# Altium PCB master-pcb.PcbDoc
Units mil, origin at the board's own origin, x right, y up, seen from the top; angles counter-clockwise.
Board outline 4685 x 4350 mil, 2 copper layers (Top Layer, Bottom Layer); 23 components, 82 nets, 235 pads, 18 vias.
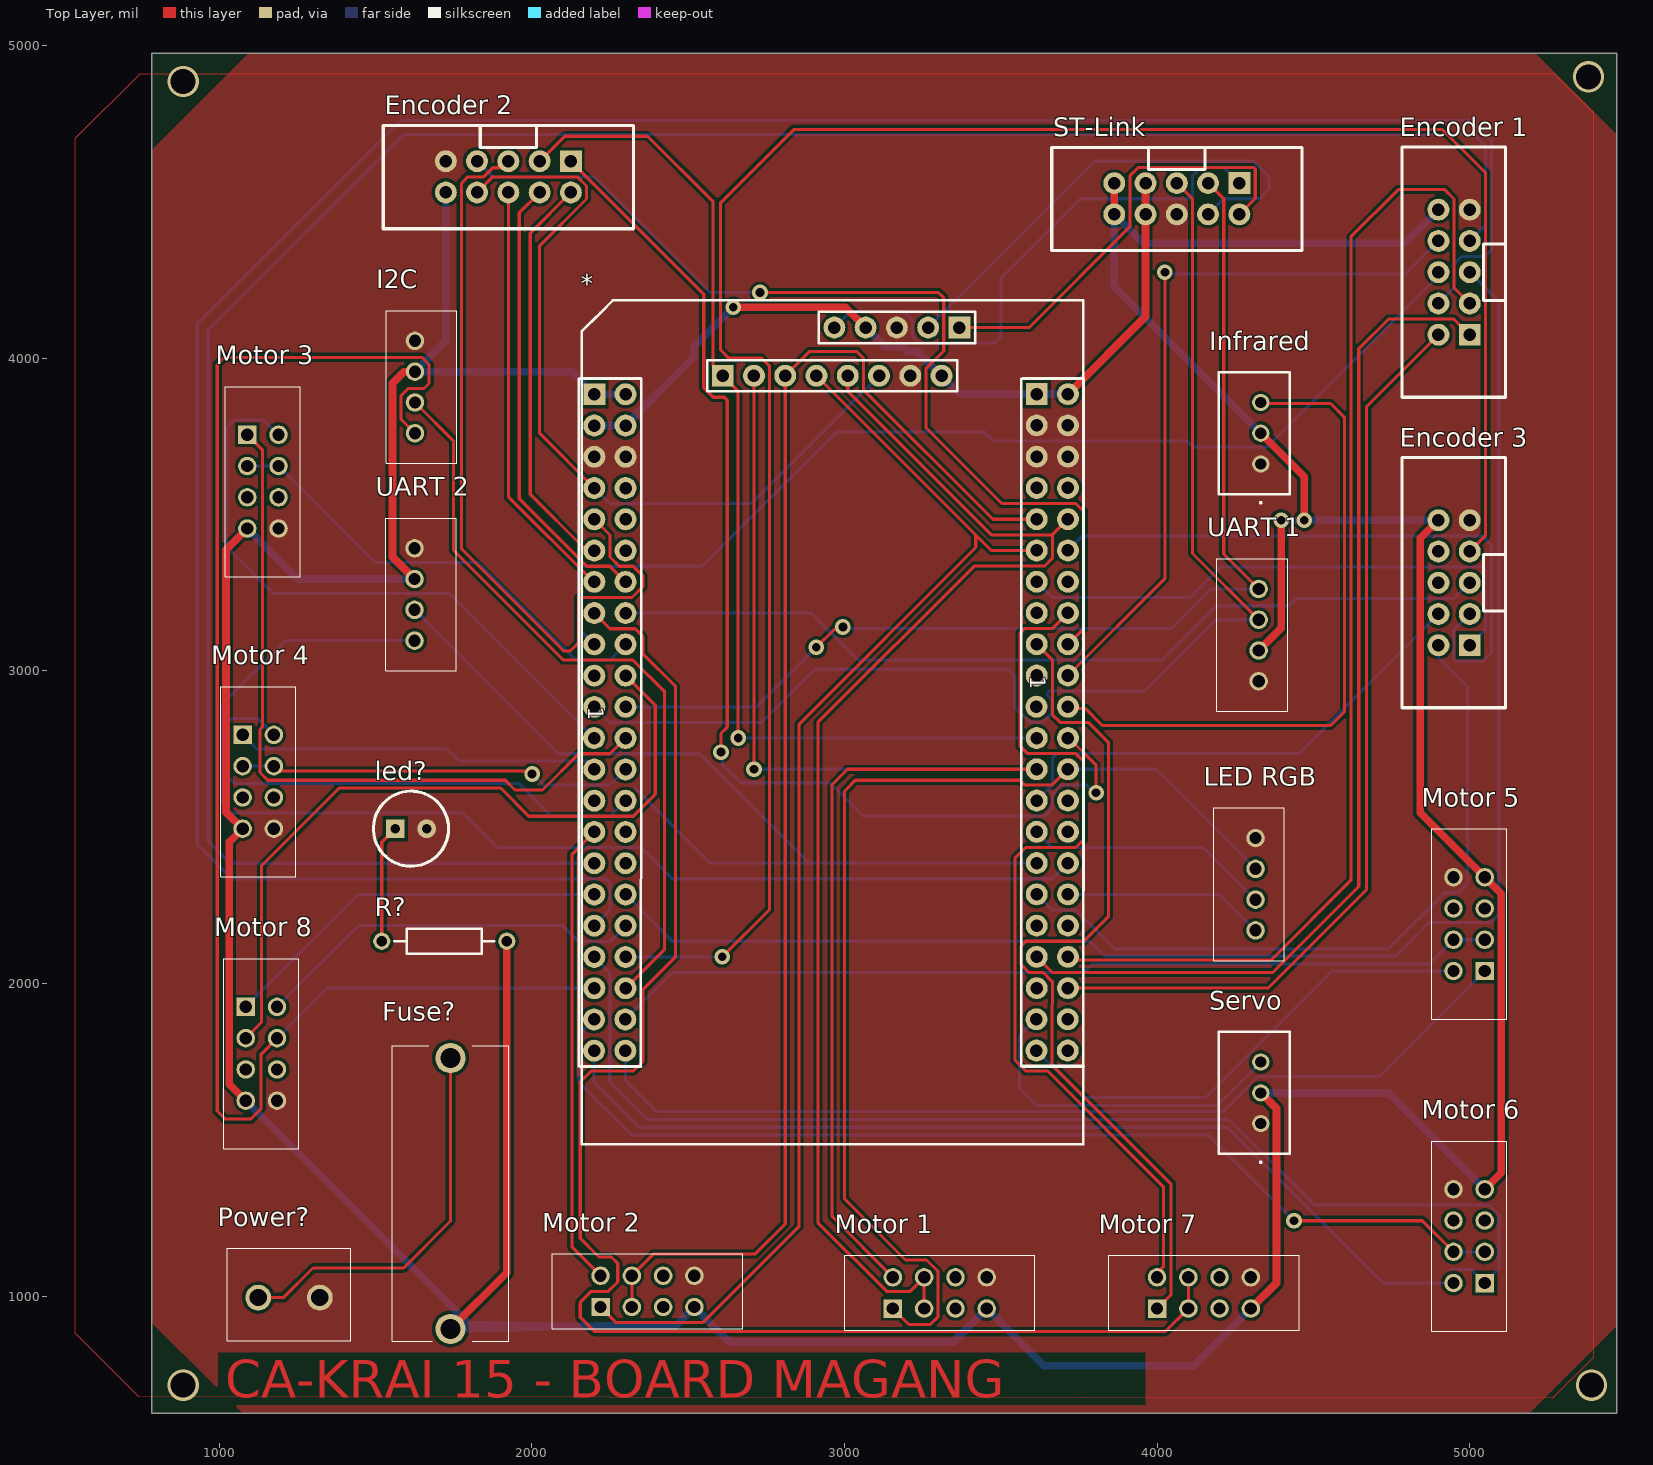
[diagram p0: Top Layer view]
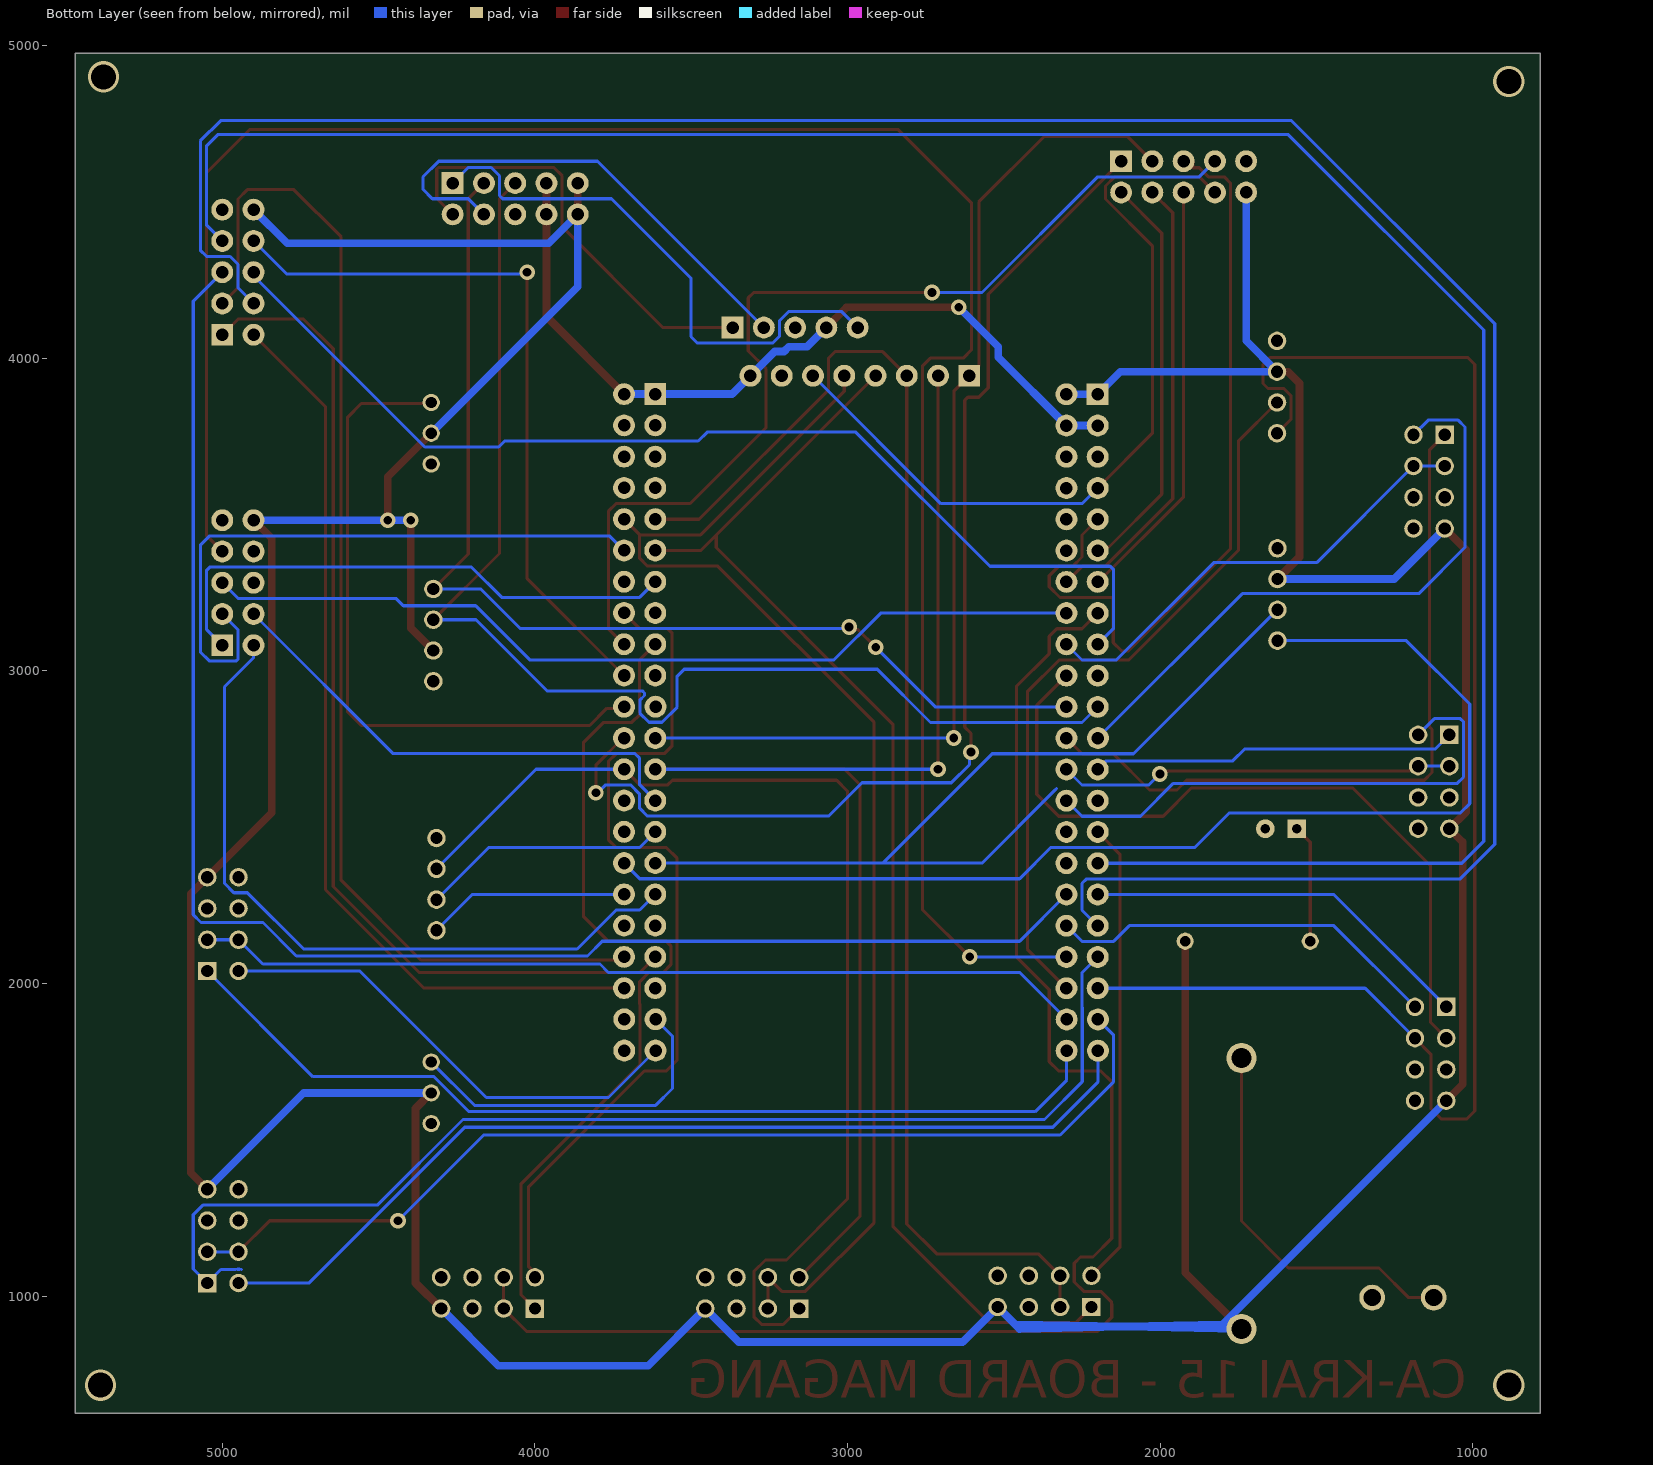
[diagram p1: Bottom Layer view, seen from below]

## Layer stack, top to bottom
Top Solder: solder mask 0.4, Solder Resist, Dk 3.5
Top Layer: signal copper 1.4
Dielectric 1: dielectric 12.6, FR-4, Dk 4.8
Bottom Layer: signal copper 1.4
Bottom Solder: solder mask 0.4, Solder Resist, Dk 3.5

## Board outline
785,625 5470,625 5470,4975 785,4975

## Design rules (kind name [scope] priority, off if disabled: settings)
Clearance [All] p1: gap=10 ignorepadtopadclearanceinfootprint=FALSE except(0: Arc-Hole Track-Hole SMDPad-Hole THPad-Hole Via-Hole Fill-Hole Poly-Hole Region-Hole Text-Hole)
PolygonConnect [All] p1: connectstyle=Direct reliefconductorwidth=10 reliefentries=4 polygonreliefangle="90 Angle" airgapwidth=10
RoutingVias [All] p1: holewidth=28 width=50 viastyle="Through Hole" minholewidth=28 minwidth=50 maxholewidth=28 maxwidth=50
SolderMaskExpansion [All] p1: expansion=4 istentingtop=FALSE
Width 3V [InNet('3V')] p1: maxlimit=30 minlimit=20 preferedwidth=25 minimp=50.000000 maximp=50.000000 favimp=50.000000
Width Width_1 [InNet('GND')] p2: maxlimit=30 minlimit=20 preferedwidth=25 minimp=50.000000 maximp=50.000000 favimp=50.000000
Width 5V [InNet('5V')] p3: maxlimit=30 minlimit=20 preferedwidth=25 minimp=50.000000 maximp=50.000000 favimp=50.000000
30 further rules are at their usual default settings.

## Components (designator, comment, footprint, x,y, rotation, side; value= is the part's Value field where it differs from the comment)
* "STM32F407VET6" MICON 2959.31,2835.28 r0 top
"Encoder 1" "Header ISP" "Header ISP" 5100,4175.07 r90 top
"Encoder 2" "Header ISP" "Header ISP" 2025,4730 r180 top
"Encoder 3" "Header ISP" "Header ISP" 5100,3181.75 r90 top
Fuse? "C3131" C3131 1740,895 r90 top
I2C "B4B-XH-A_LF__SN_" B4BXHALFSN 1626.24,4055.28 r270 top
Infrared "B3B-XH-A_LF__SN_" B3BXHALFSN 4331.73,3661.57 r90 top
"LED RGB" "B4B-XH-A_LF__SN_" B4BXHALFSN 4315,2169.72 r90 top
led? "LED 5mm" "LED 5mm" 1613.57,2495 r0 top
"Motor 1" "09181089622" 09181089622 3155,960 r0 top
"Motor 2" "09181089622" 09181089622 2220,965 r0 top
"Motor 3" "09181089622" 09181089622 1090,3755 r270 top
"Motor 4" "09181089622" 09181089622 1075,2795 r270 top
"Motor 5" "09181089622" 09181089622 5048.02,2039.79 r90 top
"Motor 6" "09181089622" 09181089622 5048.02,1041.54 r90 top
"Motor 7" "09181089622" 09181089622 4000,960 r0 top
"Motor 8" "09181089622" 09181089622 1085,1925 r270 top
Power? "KF301-2P" KF3012P 1125,995 r0 top
R? "Resistor 0.25W" "Resistor 0.25W" 1720,2135 r180 top
Servo "B3B-XH-A_LF__SN_" B3BXHALFSN 4331.73,1551.57 r90 top
ST-Link "Header ISP" "Header ISP" 4163.19,4660 r180 top
"UART 1" "B4B-XH-A_LF__SN_" B4BXHALFSN 4325,2966.57 r90 top
"UART 2" "B4B-XH-A_LF__SN_" B4BXHALFSN 1625,3391.85 r270 top

## Footprints (in the part's own frame and the unit in brackets; to place one, negate y for a bottom-side part, rotate by r counter-clockwise, add the part's x,y. Pads: shape width x height; smd on the part's side, far side on the other; paste and mask are expansions set on the pad)
09181089622 [mm]
  rect 1.5x1.5 hole 1: 1(0,0)
  round 1.5 hole 1: 2(0,2.54) 3(2.54,0) 4(2.54,2.54) 5(5.08,0) 6(5.08,2.54) 7(7.62,0) 8(7.62,2.54)
  silkscreen extent -3.92,-1.78 11.54,4.32, body extent -3.92,-1.73 11.54,4.27, height 5.25
B3BXHALFSN [mm]
  round 1.4 hole 0.9: 1(0,0) 2(2.5,0) 3(5,0)
  silkscreen extent -3.2,-2.35 7.45,3.4, body extent -2.45,-2.35 7.45,3.4, height 7.09
B4BXHALFSN [mm]
  round 1.5 hole 1: 1(0,0) 2(2.5,0) 3(5,0) 4(7.5,0)
  silkscreen extent -2.45,-2.35 9.95,3.4, body extent -2.45,-2.35 9.95,3.4, height 7.52
C3131 [mm]
  round 2.46 hole 1.64: 1(0,0) 2(22,0)
  silkscreen extent -1,-4.75 23,4.75, body extent -1,-4.75 23,4.75, height 10.6
"Header ISP" [mil]
  rect 70x70 hole 40: 1(-100,100)
  round 70 hole 40: 2(-100,200) 3(0,100) 4(0,200) 5(100,100) 6(100,200) 7(200,100) 8(200,200) 9(300,100) 10(300,200)
  silkscreen extent -300,-14 500,316, body extent -300,-20 501,334, height 365
KF3012P [mm]
  round 2.1 hole 1.4: 1(0,0) 2(5,0)
  silkscreen extent -2.5,-3.5 7.5,4, body extent -2.99,-3.35 7.51,4.15, height 10
"LED 5mm" [mil]
  rect 60x60 hole 30: 1(-50,0)
  round 60 hole 30: 2(50,0)
  silkscreen extent -120,-120 120,120, body extent -117,-118 96,118, height 268
MICON [mil] "STM32F407VET6"
  round 70 hole 40: 3V3(-759.34,949.33) 3V3(-659.34,949.33) 3V3(108.46,1262.79) 3V3(351.3,1108.52) 3V3(755.69,1049.72) 5V(-659.34,1049.33) BOOT0(8.46,1262.79) GND(-759.34,849.33) GND(-659.34,849.33) GND(208.46,1262.79) GND(251.3,1108.52) GND(655.69,849.72) GND(655.69,949.72) GND(755.69,849.72) GND(755.69,949.72) PA0(755.69,-550.28) PA1(655.69,-550.28) PA2(755.69,-450.28) PA3(655.69,-450.28) PA4(755.69,-350.28) PA5(655.69,-350.28) PA6(755.69,-250.28) PA7(655.69,-250.28) PA8(-759.34,149.33) PA9(-659.34,49.33) PA10(-759.34,49.33) PA11(-659.34,-50.67) PA12(-760.12,-50.39) PA15(-659.34,-150.67) PB0(755.69,-50.28) PB1(655.69,-50.28) PB3(-659.34,-750.67) PB5(-759.34,-750.67) PB6(-659.34,-850.67) PB7(-759.34,-850.67) PB8(-660.12,-950.39) PB9(-760.12,-950.39) PB10(655.69,449.72) PB11(755.69,549.72) PB12(-48.7,1108.52) PB12(655.69,549.72) PB13(51.3,1108.52) PB13(755.69,649.72) PB14(-148.7,1108.52) PB14(655.69,649.72) PB15(-759.33,749.33) PB15(151.3,1108.52) PC0(755.69,-750.28) PC1(655.69,-750.28) PC2(755.69,-650.28) PC3(655.69,-650.28) PC4(755.69,-150.28) PC5(-248.7,1108.52) PC5(655.69,-150.28) PC6(-759.34,349.33) PC7(-659.34,249.33) PC8(-759.34,249.33) PC9(-659.34,149.33) PC10(-759.34,-150.67) PC11(-659.34,-250.67) PC12(-759.34,-250.67) PC13(655.69,-850.28) PD0(-659.34,-350.67) PD1(-759.34,-350.67) PD2(-659.34,-450.67) PD3(-759.34,-450.67) PD4(-659.34,-550.67) PD5(-759.34,-550.67) PD6(-659.34,-650.67) PD7(-759.34,-650.67) PD8(-659.33,749.33) PD9(-659.34,649.33) PD10(-759.34,649.33) PD11(-659.34,549.33) PD12(-759.34,549.33) PD13(-659.34,449.33) PD14(-759.34,449.33) PD15(-659.34,349.33) PE0(-660.12,-1050.39) PE1(-760.12,-1050.39) PE2(754.92,-1050) PE3(654.92,-1050) PE4(754.92,-950) PE5(654.92,-950) PE6(755.69,-850.28) PE7(755.69,49.72) PE8(654.92,50) PE9(755.69,149.72) PE10(655.69,149.72) PE11(755.69,249.72) PE12(655.69,249.72) PE13(755.69,349.72) PE14(655.69,349.72) PE15(755.69,449.72) SWDIO(308.46,1262.79) VDD(655.69,749.72) VREF(755.69,749.72)
  rect 70x70 hole 40: 3V3(655.69,1049.72) 5V(-759.34,1049.33) PB1(-348.7,1108.52) SWCLK(408.46,1262.79)
  silkscreen extent -809,-1350 806,1350, body extent -810,-1100 806,1313, height 327
"Resistor 0.25W" [mm]
  round 1.4 hole 0.85: 1(-5.08,0) 2(5.08,0)
  silkscreen extent -4.06,-1.02 4.06,1.02, body extent -5.35,-1.27 5.35,1.33, height 2.7

## Part data
*: library part Micon?
"Encoder 1" "Encoder 3": "Encoder Posisi X"
"Encoder 2": "Encoder Posisi Y"
Fuse?: "Undefined or Miscellaneous", Manufacturer_Name="Xucheng Elec", Datasheet Link=https://datasheet.lcsc.com/szlcsc/XC-Elec-Shenzhen-5x20-BLX-Fuse-holder_C3131.pdf, Height=10.5mm, Manufacturer_Part_Number=C3131
I2C "LED RGB" "UART 1" "UART 2": "Connector", Arrow Part Number=B4B-XH-A(LF)(SN), Manufacturer_Name="JST (JAPAN SOLDERLESS TERMINALS)", Arrow Price/Stock=https://www.arrow.com/en/products/b4b-xh-a-lf-sn/jst-manufacturing, Datasheet Link=https://datasheet.lcsc.com/szlcsc/JST-Sales-America-B4B-XH-A-LF-SN_C144395.pdf, Height=7mm, Manufacturer_Part_Number=B4B-XH-A(LF)(SN)
Infrared: "Connector", Arrow Part Number=B3B-XH-A(LF)(SN), Manufacturer_Name="JST (JAPAN SOLDERLESS TERMINALS)", Arrow Price/Stock=https://www.arrow.com/en/products/b3b-xh-a-lf-sn/jst-manufacturing?region=europe, Datasheet Link=https://datasheet.lcsc.com/szlcsc/1812131720_JST-Sales-America-B3B-XH-A-LF-SN_C144394.pdf, Height=7mm, Manufacturer_Part_Number=B3B-XH-A(LF)(SN)
"Motor 1" "Motor 2" "Motor 3" "Motor 4" "Motor 5" "Motor 6" "Motor 7" "Motor 8": "Connector", Manufacturer_Name=HARTING, Mouser Part Number=617-09181089622, Datasheet Link=http://uk.rs-online.com/web/p/products/6935182, Height=5.5mm, Manufacturer_Part_Number=09181089622, Mouser Price/Stock=https://www.mouser.co.uk/ProductDetail/HARTING/09181089622?qs=FeiuqfHlVTv2CjJEejdN9Q%3D%3D
Power?: "Connector", Manufacturer_Name="Handson Technology", Datasheet Link=http://www.handsontec.com/dataspecs/terminal%20block-5mm.pdf, Height=10mm, Manufacturer_Part_Number=KF301-2P
Servo: "Servo pin", Arrow Part Number=B3B-XH-A(LF)(SN), Manufacturer_Name="JST (JAPAN SOLDERLESS TERMINALS)", Arrow Price/Stock=https://www.arrow.com/en/products/b3b-xh-a-lf-sn/jst-manufacturing?region=europe, Datasheet Link=https://datasheet.lcsc.com/szlcsc/1812131720_JST-Sales-America-B3B-XH-A-LF-SN_C144394.pdf, Height=7mm, Manufacturer_Part_Number=B3B-XH-A(LF)(SN)
ST-Link: "ST-Link Port"

## Via types
v1: diameter 50, hole 28, Top Layer to Bottom Layer, 14 vias
v2: diameter 100, hole 80, Top Layer to Bottom Layer, 3 vias
v3: diameter 100/100 (per signal layer), hole 80, Top Layer to Bottom Layer, 1 vias

## Nets (pads, with @x,y where several pads share a name; then routed paths per layer and width w, separated by ;. In a path a pad name is that pad's centre, name@x,y a point inside that pad or via, vN(x,y) a via of type N, cw(c..) or ccw(c..) an arc to the next point about the centre after c; other vN are vias at no path point)
3V: *.3V3 ST-Link.7 ST-Link.8 | length 2584.1
  Top Layer w25: v1(2644.53,4162.72) 3003.11,4162.72 *.3V3@3067.77,4098.07 ; *.3V3@3715,3885 3963.19,4133.19 ST-Link.8 ST-Link.7
  Bottom Layer w25: *.3V3@2199.97,3784.61 2299.97,3784.61 2518.11,4002.75 2518.11,4036.3 v1(2644.53,4162.72) ; *.3V3@3067.77,4098.07 3129.53,4036.3 3188.11,4036.3 3203.11,4021.3 3233.11,4021.3 3310.61,3943.8 3369.41,3885 3615,3885 *.3V3@3715,3885
5V: "Encoder 1.10" "Encoder 2.10" "Encoder 3.10" "Motor 1.7" "Motor 2.7" "Motor 3.7" "Motor 4.7" "Motor 5.7" "Motor 6.7" "Motor 7.7" "Motor 8.7" "UART 1.2" "UART 2.2" *.5V Fuse?.1 I2C.2 Infrared.2 R?.1 Servo.2 ST-Link.9 ST-Link.10 | length 17686.4
  Top Layer w25: 1085,1625 1032,1678 1032,2452 1075,2495 1022,2548 1022,3387 1090,3455 ; 1625,3293.43 1554.21,3364.22 1554.21,3920 1591.06,3956.85 I2C.2 ; Fuse?.1 1920,1075 R?.1 ; ST-Link.10 ST-Link.9 ; 4300,960 4382,1042 4382,1599.73 Servo.2 ; 4325,3065 4397.03,3137.03 v1(4397.03,3481.75) ; Infrared.2 4471,3620.73 v1(4471,3481.75) ; 4900,3481.75 4842,3423.75 4842,2545.81 5048.02,2339.79 5101,2286.81 5101,1394.51 5048.02,1341.54
  Bottom Layer w25: 1085,1625 1800.36,909.64 2114.37,902.57 ; 1090,3455 1251.57,3293.43 1625,3293.43 ; 1725,4530 1725,4055.61 I2C.2 2127.72,3956.85 2199.97,3884.61 *.5V@2299.97,3884.61 ; Fuse?.1 2114.37,902.57 ; 4300,960 4117,777 3638,777 3455,960 3348,853 2632,853 2520,965 2464.64,909.64 ; Servo.2 4739.56,1650 5048.02,1341.54 ; Infrared.2 3863.19,4228.54 ST-Link.10 3955.69,4367.5 4792.43,4367.5 4900,4475.07 ; v1(4397.03,3481.75) v1(4471,3481.75) 4900,3481.75 ; 2114.37,902.57 2464.64,909.64 ; 2114.37,902.57 2450,895 2464.64,909.64
Fuse: Fuse?.2 Power?.1 | length 1237.6
  Top Layer w10: Power?.1 1205,995 1300,1090 1590,1090 1740,1240 Fuse?.2
GND: "Encoder 1.9" "Encoder 2.9" "Encoder 3.9" "LED RGB.4" "Motor 1.8" "Motor 2.8" "Motor 3.8" "Motor 4.8" "Motor 5.8" "Motor 6.8" "Motor 7.8" "Motor 8.8" "UART 1.1" "UART 2.1" *.GND I2C.1 Infrared.1 led?.2 Power?.2 Servo.1 ST-Link.6
Netled?_1: led?.1 R?.2 | length 378
  Top Layer w10: R?.2 1520,2451.43 led?.1
PA_0: "LED RGB.1" *.PA0 | length 647.7
  Bottom Layer w10: *.PA0 4199.72,2285 4315,2169.72
PA_1: "Encoder 3.2" *.PA1 | length 2337.7
  Bottom Layer w10: *.PA1 3665,2235 3740,2235 3865,2110 4740,2110 4920,2290 4963,2290 4993,2320 4993,2948.75 4900,3041.75 4900,3081.75
PA_2: "UART 2.4" *.PA2 | length 3843
  Bottom Layer w10: 1625,3096.57 1212.57,3096.57 1010,2894 1010,2575 1040,2545 1779,2545 1889.39,2434.61 2350,2434.61 2449.61,2335 3665,2335 *.PA2
PA_3: "UART 2.3" *.PA3 | length 3006
  Bottom Layer w10: 1625,3195 2085.39,2734.61 2537.39,2734.61 2887,2385 ; *.PA3 2887,2385 ; 2332.01,2622.99 cw(c2299.97,2584.61) 2338.35,2616.65 ; 2332.01,2622.99 cw(c2299.97,2584.61) 2338.35,2616.65 ; 2332.01,2622.99 cw(c2299.97,2584.61) 2338.35,2616.65 ; 2332.01,2622.99 cw(c2299.97,2584.61) 2338.35,2616.65 ; 2338.35,2616.65 2570,2385 2887,2385
PA_4: *.PA4
PA_5: "LED RGB.2" *.PA5 | length 789.8
  Bottom Layer w10: *.PA5 3665,2435 4148.15,2435 4315,2268.15
PA_6: *.PA6
PA_7: "Encoder 3.4" *.PA7 | length 1582
  Bottom Layer w10: *.PA7 3665,2635 3665,2720 3680,2735 4453.25,2735 4900,3181.75
PA_8: *.PA8
PA_9: "UART 1.4" *.PA9 ST-Link.3 | length 3550.6
  Top Layer w10: v1(2910,3075) 2967.35,3132.35 2987.35,3132.35 v1(2995,3140) ; ST-Link.3 4213.19,4510 4213.19,3373.66 4325,3261.85
  Bottom Layer w10: *.PA9 2719.61,2884.61 v1(2910,3075) ; v1(2995,3140) 3000,3135 4046,3135 4172.85,3261.85 4325,3261.85
PA_10: "UART 1.3" *.PA10 ST-Link.5 | length 4044.3
  Top Layer w10: ST-Link.5 4113.19,4510 4113.19,3375.24 4325,3163.43
  Bottom Layer w10: *.PA10 2249.97,2834.61 2734.61,2834.61 2905,3005 3522.63,3005 3545,2982.63 3545,2883.79 3593.52,2835.28 3634.94,2835.28 3664.23,2864.57 3664.23,2905.99 3649.35,2920.86 3649.35,2929.14 3655.21,2935 3960,2935 4188.43,3163.43 4325,3163.43
PA_11: "Motor 3.1" *.PA11 | length 2365.6
  Top Layer w10: 1090,3755 1139.06,3705.94 1139.06,2821.28 1130.47,2812.7 1130.47,2674.53 1155,2650 1915.22,2650 1946.38,2618.84 2034.23,2618.84 2150,2734.61 2249.97,2734.61 *.PA11
PA_12: "Motor 3.2" *.PA12 | length 2005.5
  Bottom Layer w10: 1190,3755 1143,3802 1047,3802 1025,3780 1025,3395 1173,3247 1737.08,3247 *.PA12
PA_15: "Motor 4.3" "Motor 4.4" *.PA15 | length 1270.7
  Top Layer w10: 1175,2695 1188.27,2695 1203.27,2680 1975.14,2680 1977.49,2677.65 1993.35,2677.65 v1(2001,2670)
  Bottom Layer w10: 1075,2695 1175,2695 ; v1(2001,2670) 2036.39,2634.61 2249.97,2634.61 *.PA15
PB_0: "Encoder 2.1" *.PB0 | length 3724.1
  Top Layer w10: 2125,4630 2550,4205 2550,3905 2580,3875 2615,3875 2625,3865 2625,2820 2605,2800 v1(2605,2740) ; *.PB0 3718.28,2785 3805,2698.28 v1(3805,2610)
  Bottom Layer w10: v1(2605,2740) 2610,2735 2610,2700 2668,2642 2954,2642 3061,2535 3640,2535 3665,2560 3665,2605.71 3694.29,2635 3773.43,2635 3798.43,2610 v1(3805,2610)
PB_1: "Encoder 2.3" *.PB1 | length 3378.3
  Top Layer w10: 2025,4630 2105,4710 2370,4710 2580,4500 2580,3974.41 2610.61,3943.8 2660,3894.41 v1(2660,2785)
  Bottom Layer w10: v1(2660,2785) *.PB1@3615,2785
PB_3: "Encoder 3.7" *.PB3 | length 6743
  Top Layer w10: v1(2609,2085) 2760.61,2236.61 2760.61,3974.39 2735,4000 2630,4000 2604,4026 2604,4497 2838,4731 4913,4731 5050,4594 5050,3431.75 5000,3381.75
  Bottom Layer w10: *.PB3 2608.61,2084.61 v1(2609,2085)
PB_5: "Motor 6.1" *.PB5 | length 3824.4
  Bottom Layer w10: *.PB5 2249.97,2034.61 2249.97,1923.77 2249.19,1923 2249.19,1685.81 2370,1565 4230,1565 4504,1291 5062,1291 5093,1260 5093,1086.51 5048.02,1041.54 5004.56,1085 4957.7,1085 ; 4957.7,1085 ccw(c4948.02,1041.54) 4938.35,1085 cw(c4948.02,1041.54) 4957.7,1085
PB_6: *.PB6 I2C.3 | length 2387.1
  Top Layer w10: I2C.3 1750,3734.66 1750,3385 2100.39,3034.61 2323.39,3034.61 2425,2933 2425,2109.64 *.PB6
PB_7: "Motor 8.4" *.PB7 I2C.4 | length 4880.2
  Top Layer w10: 1185,1825 1134,1774 1134,1600 1100,1566 1020,1566 994,1592 994,3980 1016,4002 1649,4002 1671,3980 1671,3919 1655,3903 1604.71,3903 1581.71,3880 1581.71,3804.53 I2C.4
  Bottom Layer w10: 1185,1825 1344.61,1984.61 *.PB7
PB_8: "Motor 5.3" "Motor 5.4" *.PB8 | length 2854.4
  Bottom Layer w10: *.PB8 2449.31,2035 3765,2035 3792,2062 4870.23,2062 4948.02,2139.79 5048.02,2139.79
PB_9: "Motor 6.3" "Motor 6.4" *.PB9 | length 3344.2
  Top Layer w10: v1(4438,1241) 4848.56,1241 4948.02,1141.54
  Bottom Layer w10: *.PB9 2149,1834.69 2149,1686 2320,1515 4164,1515 v1(4438,1241) ; 4948.02,1141.54 5048.02,1141.54
PB_10: "Encoder 3.1" *.PB10 | length 1760.6
  Bottom Layer w10: *.PB10 3665,3235 4106,3235 4202.75,3331.75 5040,3331.75 5050,3321.75 5050,3131.75 5000,3081.75
PB_11: "Encoder 3.3" *.PB11 | length 2028
  Bottom Layer w10: *.PB11 3761.75,3431.75 5040,3431.75 5070,3401.75 5070,3060 5041.75,3031.75 4955,3031.75 4950,3036.75 4950,3131.75 5000,3181.75
PB_12: "Motor 2.1" *.PB12 | length 4163.8
  Top Layer w10: 2220,965 2269,916 2548,916 2855,1223 2855,2829.41 3420,3394.41 3420,3434.41 ; *.PB12@2910.61,3943.8 3420,3434.41 ; *.PB12@3615,3385 3469.41,3385 3420,3434.41
PB_13: "Motor 1.3" "Motor 1.4" *.PB13 | length 4157
  Top Layer w10: *.PB13@3010.61,3943.8 3010.61,3894.39 3470,3435 3665,3435 ; 3255,960 3255,1060 3210,1015 3135,1015 2915,1235 2915,2835 3415,3335 3640,3335 3665,3360 3665,3435 ; *.PB13@3715,3485 3665,3435
PB_14: "Motor 2.3" "Motor 2.4" *.PB14 | length 4490
  Top Layer w10: 2320,965 2320,1065 2390,1135 2715,1135 2810.61,1230.61 2810.61,3943.8 2887.81,4021 3040,4021 3060.61,4000.39 3060.61,3899.39 3475,3485 *.PB14@3615,3485
PB_15: "Encoder 2.8" *.PB15 | length 2584.4
  Top Layer w10: 1825,4530 1875,4580 2145.71,4580 2175,4550.71 2175,4509.29 2025,4359.29 2025,3759.59 *.PB15@2199.98,3584.61
  Bottom Layer w10: *.PB15@2199.98,3584.61 2249.98,3534.61 2701.42,3534.61 *.PB15@3110.61,3943.8
PC_0: "Encoder 1.3" *.PC0 | length 3832.4
  Top Layer w10: *.PC0 3725,2075 4365,2075 4620,2330 4620,4388 4771,4539 4920,4539 4950,4509 4950,4225.07 5000,4175.07
PC_1: "Encoder 1.1" *.PC1 | length 3299.7
  Top Layer w10: *.PC1 3665,2035 4370,2035 4645,2310 4645,4030 4740.07,4125.07 4950,4125.07 5000,4075.07
PC_2: *.PC2
PC_3: *.PC3
PC_4: "LED RGB.3" "Motor 1.1" *.PC4 | length 3509
  Top Layer w10: 3155,960 3206,909 3275,909 3299.53,933.53 3299.53,1078.44 3262.41,1115.56 3195.3,1115.56 3000,1310.86 3000,2615 3035,2650 3560,2650 3575,2635 3665,2635 *.PC4
  Bottom Layer w10: *.PC4 3996.57,2685 4315,2366.57
PC_5: "Motor 1.2" *.PC5 | length 4494.7
  Top Layer w10: v1(2710.61,2685) *.PC5@2710.61,3943.8 ; 3155,1060 2960,1255 2960,2635 3010,2685 *.PC5@3615,2685
  Bottom Layer w10: v1(2710.61,2685) *.PC5@3615,2685
PC_6: "Motor 7.3" "Motor 7.4" *.PC6 | length 4861.9
  Top Layer w10: *.PC6 2249.97,3134.61 2330.39,3134.61 2355,3110 2355,3055 2460,2950 2460,2085 2355,1980 2355,1750 2325,1720 2190,1720 2155,1685 2155,1185 2215,1125 2255,1125 2275,1105 2275,1045 2245,1015 2189.73,1015 2155.47,980.74 2155.47,975.47 2155,975 2155,932 2200,887 4027,887 4100,960 4100,1060
PC_7: "Motor 3.3" "Motor 3.4" *.PC7 | length 1487.7
  Bottom Layer w10: 1090,3655 1190,3655 1498,3347 1827.61,3347 2140,3034.61 2249.97,3034.61 *.PC7
PC_8: "Encoder 1.6" *.PC8 | length 3451.1
  Bottom Layer w10: *.PC8 2149,3135.57 2149,3323.61 2160,3334.61 2544.61,3334.61 2973.52,3763.52 3449.29,3763.52 3477.81,3735 4097,3735 4116,3716 4352,3716 4900,4264 4900,4275.07
PC_9: "Motor 8.3" *.PC9 | length 2420.3
  Top Layer w10: 1085,1825 1135,1875 1135,2375.86 1384.14,2625 1900.22,2625 1990.61,2534.61 2324.61,2534.61 2395,2605 2395,2889.57 *.PC9
PC_10: "Motor 4.1" *.PC10 | length 1170.7
  Bottom Layer w10: 1075,2795 1120,2750 1730,2750 1768,2712 2172.57,2712 *.PC10
PC_11: "Motor 4.2" *.PC11 | length 1690.3
  Bottom Layer w10: 1175,2795 1123,2847 1040,2847 1030,2837 1030,2660 1050,2640 1957.66,2640 2063.05,2534.61 2249.97,2534.61 *.PC11
PC_12: *.PC12
PC_13: *.PC13
PD_0: *.PD0
PD_1: "Motor 2.2" *.PD1 | length 1486.7
  Top Layer w10: *.PD1 2129,2413.64 2129,1156 2220,1065
PD_2: *.PD2
PD_3: "Encoder 1.7" *.PD3 | length 7583.1
  Bottom Layer w10: *.PD3 1035.39,2384.61 965,2455 965,4090 1590,4715 5015,4715 5050,4680 5050,4425.07 5000,4375.07
PD_4: "Encoder 1.5" *.PD4 | length 5022.7
  Bottom Layer w10: *.PD4 2449.57,2135 3785,2135 3832,2088 4763,2088 4870,2195 5068,2195 5093,2220 5093,4182.07 5000,4275.07
PD_5: "Motor 8.1" *.PD5 | length 1263.9
  Bottom Layer w10: 1085,1925 1444.61,2284.61 *.PD5
PD_6: "Motor 8.2" *.PD6 | length 1264.2
  Bottom Layer w10: 1185,1925 1445,2185 2098.61,2185 2149,2134.61 2249.97,2134.61 *.PD6
PD_7: "Encoder 1.4" *.PD7 | length 8263.3
  Bottom Layer w10: *.PD7 2249.97,2234.61 2249.97,2320 2235.36,2334.61 1040.39,2334.61 930,2445 930,4110 1580,4760 5005,4760 5070,4695 5070,4345 5050.07,4325.07 4975.07,4325.07 4950,4300 4950,4225.07 4900,4175.07
PD_8: *.PD8
PD_9: *.PD9
PD_10: "Encoder 2.5" *.PD10 | length 2552.9
  Top Layer w10: 1925,4630 1895,4630 1895,4609 1874.71,4609 1845.71,4580 1795,4580 1775,4560 1775,3390 2101.64,3063.36 2123.36,3063.36 2150,3090 2150,3147.64 ; 2149.97,3147.68 2149.97,3234.57 ; 2150,3234.61 2320.68,3234.61 2355,3268.93 2355,3304.22 2324.61,3334.61 2279.25,3334.61 2249.97,3363.9 2249.97,3434.61 *.PD10
PD_11: *.PD11
PD_12: "Encoder 2.2" *.PD12 | length 1298.5
  Top Layer w10: 2125,4530 1995,4400 1995,3565 2163.91,3396.09 2188.49,3396.09 *.PD12
PD_13: "Encoder 2.4" *.PD13 | length 1456.8
  Top Layer w10: 2025,4530 1960,4465 1960,3550 2175.39,3334.61 2249.97,3334.61 2252.89,3331.68 *.PD13
PD_14: "Encoder 2.6" *.PD14 | length 1361
  Top Layer w10: 1925,4530 1925,3556.72 2197.11,3284.61 *.PD14
PD_15: "Encoder 3.5" *.PD15 | length 2864.2
  Bottom Layer w10: *.PD15 2893.68,3184.61 3043.28,3035 4016.78,3035 4189.78,3208 4421,3208 4444.75,3231.75 4950,3231.75 5000,3281.75
PE_0: "Motor 5.1" *.PE0 | length 3071
  Bottom Layer w10: *.PE0 2299.19,1690.81 2400,1590 4211,1590 4323,1702 4710.23,1702 5048.02,2039.79
PE_1: "Motor 6.2" *.PE1 | length 3115.7
  Bottom Layer w10: *.PE1 2199.19,1684.17 2343.36,1540 4225,1540 4723.46,1041.54 4948.02,1041.54
PE_2: *.PE2
PE_3: "Motor 5.2" *.PE3 | length 1563.7
  Bottom Layer w10: *.PE3 3764.5,1635 4155.42,1635 4560.21,2039.79 4948.02,2039.79
PE_4: *.PE4
PE_5: *.PE5 Servo.3 | length 1095.2
  Bottom Layer w10: *.PE5 3560,1831.05 3560,1664 3614,1610 4193.31,1610 Servo.3
PE_6: "Encoder 1.2" *.PE6 | length 2955.8
  Top Layer w10: *.PE6 4355,1985 4670,2300 4670,3845.07 4900,4075.07
PE_7: *.PE7 Infrared.3 | length 2156.8
  Top Layer w10: *.PE7 3720,2880 3770,2880 3825,2825 4555,2825 4600,2870 4600,3810 4555,3855 4335.16,3855 Infrared.3
PE_8: *.PE8
PE_9: "Encoder 1.8" *.PE9 | length 2337.3
  Top Layer w10: *.PE9 4025,3295 v1(4025,4275)
  Bottom Layer w10: v1@4025,4269.14 4794.07,4269.14 4900,4375.07
PE_10: *.PE10
PE_11: "Encoder 2.7" *.PE11 | length 3173.5
  Top Layer w10: v1(2730,4210.22) 3300.55,4210.22 3317.77,4193 3317.77,4023 3260.61,3965.84 3260.61,3778.07 3503.68,3535 3740,3535 3765,3510 3765,3135 *.PE11
  Bottom Layer w10: 1825,4630 1875,4580 2200,4580 2569.78,4210.22 v1(2730,4210.22)
PE_12: "Motor 7.1" *.PE12 | length 2742.2
  Top Layer w10: *.PE12 3665,3035 3665,2860 3690,2835 3780,2835 3845,2770 3845,2215 3765,2135 3580,2135 3565,2120 3565,2060 3590,2035 3635.71,2035 3665,2005.71 3665,1935 3664.23,1934.23 3664.23,1738.77 4045,1358 4045,1005 4000,960
PE_13: "Motor 7.2" *.PE13 | length 2846.5
  Top Layer w10: *.PE13 3665,3135 3576,3135 3561,3120 3561,2760 3586,2735 3740,2735 3765,2710 3765,2460 3740,2435 3580,2435 3545,2400 3545,1755 3580,1720 3650,1720 4020,1350 4020,1093.27 4000,1073.27 4000,1060
PE_14: *.PE14
PE_15: *.PE15
RST: *.BOOT0 ST-Link.1 | length 1787.4
  Bottom Layer w10: *.BOOT0 3018.7,4149 3188.77,4149 3217.77,4120 3217.77,4070.3 3240,4048.07 3480,4048.07 3501,4069.07 3501,4256 3755,4510 4103.19,4510 4113.19,4520 4113.19,4583.19 4140,4610 4213.19,4610 ST-Link.1
SWCLK: *.SWCLK ST-Link.2 | length 1422
  Top Layer w10: *.SWCLK 3591.26,4098.07 3913.19,4420 3913.19,4583.19 3940,4610 4309,4610 4314,4605 4314,4510.81 ST-Link.2
SWDIO: *.SWDIO ST-Link.4 | length 1599.2
  Bottom Layer w10: *.SWDIO 3799.7,4630 4308,4630 4358,4580 4358,4540 4328,4510 4213.19,4510 ST-Link.4
pads on no net: "Encoder 3.6" "Encoder 3.8" "Motor 1.5" "Motor 1.6" "Motor 2.5" "Motor 2.6" "Motor 3.5" "Motor 3.6" "Motor 4.5" "Motor 4.6" "Motor 5.5" "Motor 5.6" "Motor 6.5" "Motor 6.6" "Motor 7.5" "Motor 7.6" "Motor 8.5" "Motor 8.6" *.VDD *.VREF
copper on no net:
  other v2: 885,715 5390,715 5380,4900
  other v3: 885,4885

## Polygon pours and split planes (outlines as drawn)
GND on Top Layer "GND_L01_P002" (solid, pour order 2): 1075,625 785,915 785,4665 1095,4975 5210,4975 5470,4715 5470,905 5190,625 4905,625
GND on Top Layer "NONET_L01_P000" (solid, shelved, pour order 0): 743.48,677.6 540,881.09 540,4702.97 747.03,4910 5271.09,4910 5395,4786.09 5395,802.97 5264.49,672.46

## Other copper
Top Layer:
  text "CA-KRAI 15 - BOARD MAGANG" at 1020,675 h120

## Text inside footprints (layer, text, board x,y; h text height)
*: Top Overlay "1" at 2179.97,2884.61 h50 r270; Top Overlay "1" at 3595,2985 h50 r270